# Altium PCB Assignment1.PcbDoc
Units mm, origin at the board's own origin, x right, y up, seen from the top; angles counter-clockwise.
Board outline 85.12 x 56.16 mm, 2 copper layers (Top Layer, Bottom Layer); 36 components, 17 nets, 114 pads, 30 vias.
Unrouted connection lines stored in the file: 2.
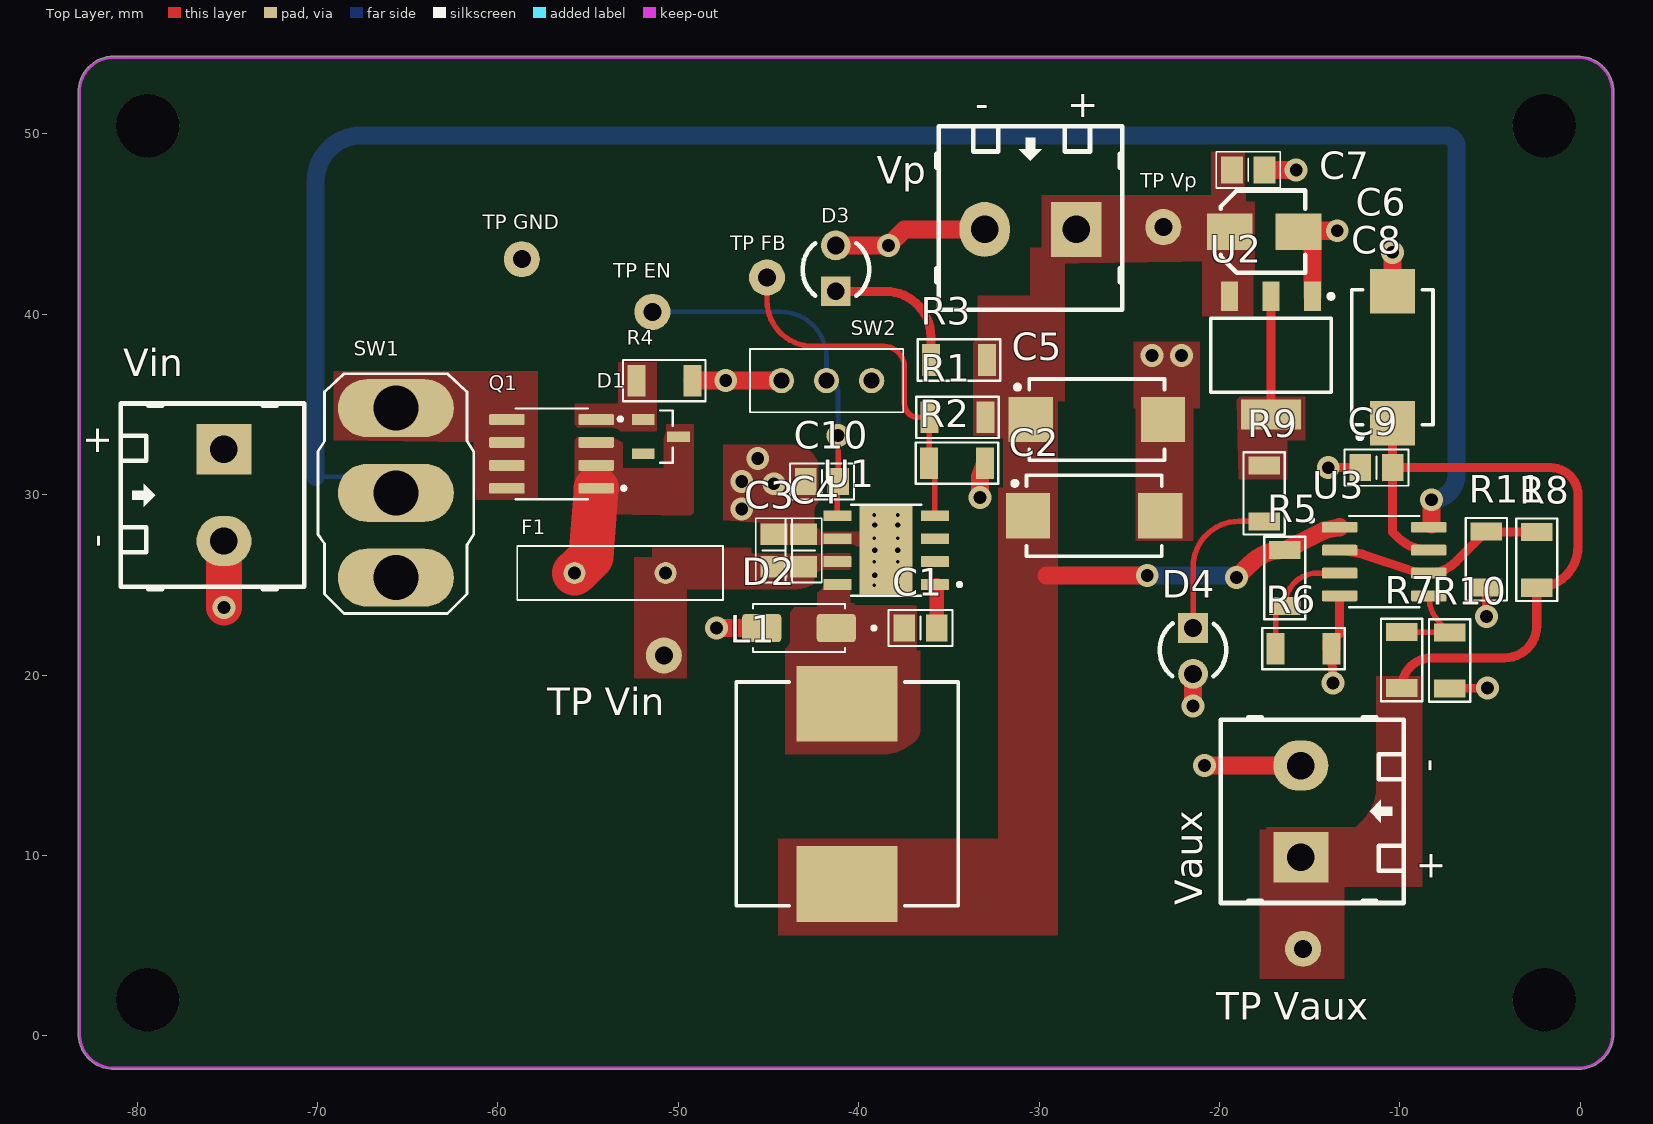
[diagram p0: Top Layer view]
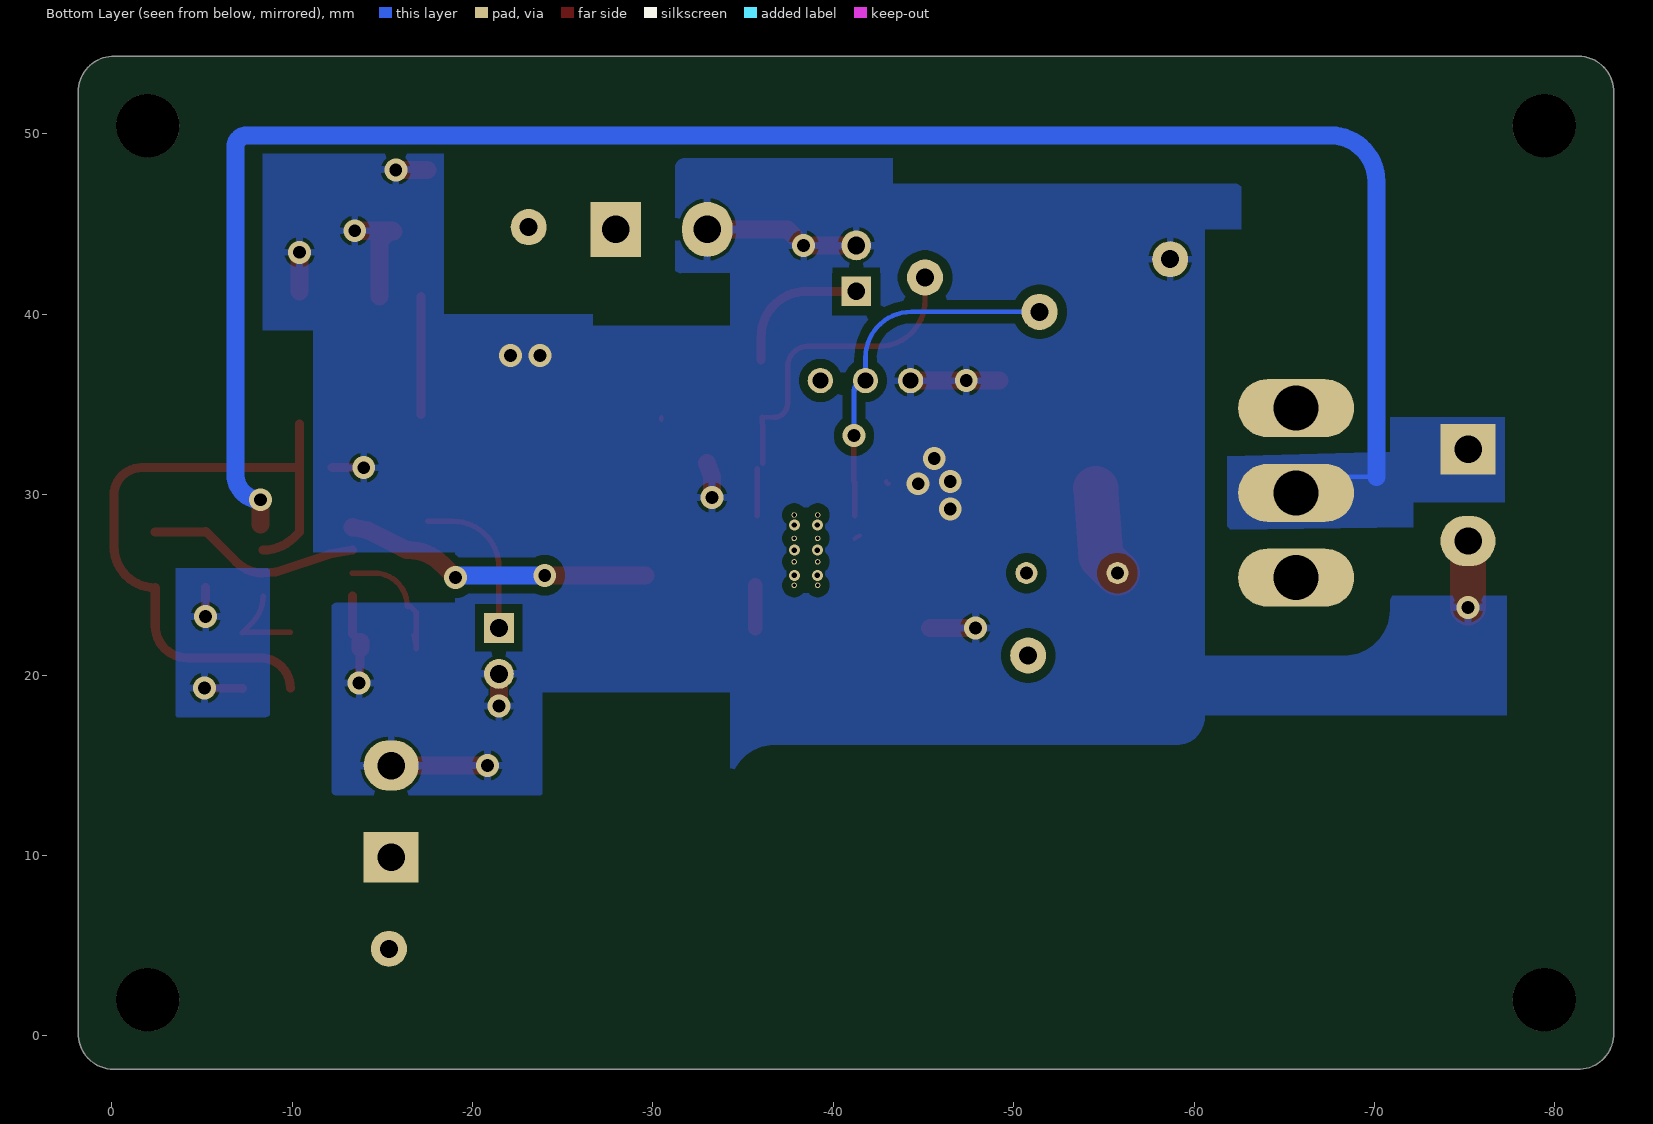
[diagram p1: Bottom Layer view, seen from below]
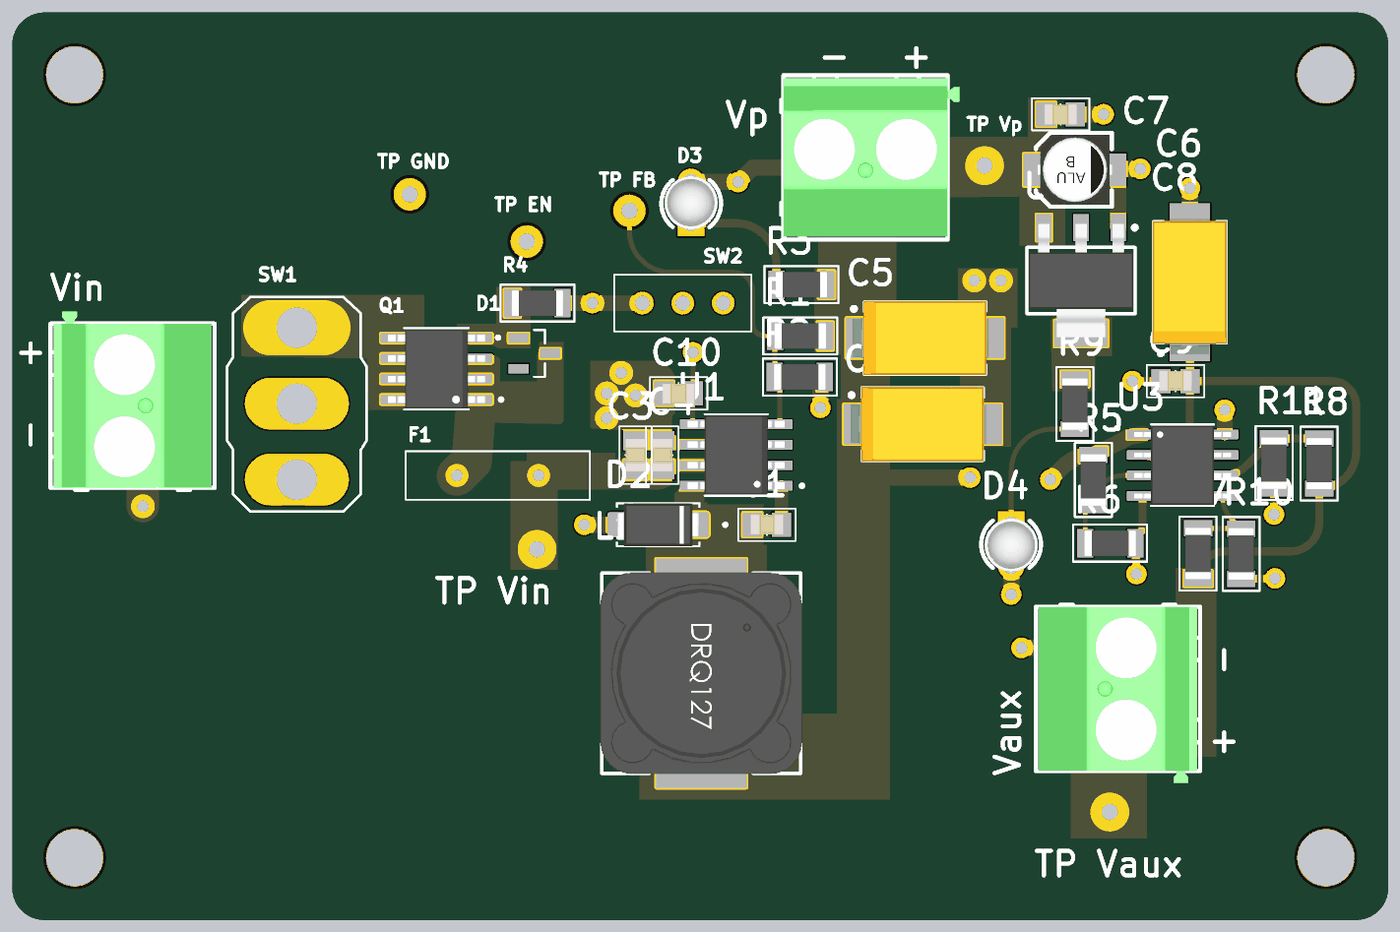
[diagram p2: 3D render of the assembled board from above, using the file's embedded part models]

## Layer stack, top to bottom
Top Solder: solder mask 0.0102, Solder Resist, Dk 3.5
Top Layer: signal copper 0.0356
Dielectric 1: dielectric 0.32, FR-4, Dk 4.8
Bottom Layer: signal copper 0.0356
Bottom Solder: solder mask 0.0102, Solder Resist, Dk 3.5

## Board outline
-83.26,-0.005 ccw(c-81.28,0.127) -81.412,-1.853 -81.407,-1.853 -0.256,-1.853 ccw(c-0.127,0.127) 1.853,-0.005 1.853,0 1.853,52.194 ccw(c-0.127,52.324) 1.858,52.324 ccw(c-0.127,52.324) 0.005,54.304 0,54.304 -81.151,54.304 ccw(c-81.28,52.324) -83.26,52.456 -83.26,52.451 -83.26,0.256 ccw(c-81.28,0.127)

## Design rules (kind name [scope] priority, off if disabled: settings)
Clearance [All] p1: gap=0.5 ignorepadtopadclearanceinfootprint=FALSE
PolygonConnect [All] p1: connectstyle=Direct reliefconductorwidth=0.4 reliefentries=4 polygonreliefangle="90 Angle" airgapwidth=0.2
RoutingVias [All] p1: holewidth=0.711 width=1.27 viastyle="Through Hole" minholewidth=0.711 minwidth=1.27 maxholewidth=0.711 maxwidth=1.27
SolderMaskExpansion [All] p1: expansion=0.102 istentingtop=FALSE
SupplyNets "Schematic Supply Nets" [InNet('GND')] p1: voltage=0.000
Width [All] p1: maxlimit=0.254 minlimit=0.254 preferedwidth=0.254
30 further rules are at their usual default settings.

## Components (designator, comment, footprint, x,y, rotation, side; value= is the part's Value field where it differs from the comment)
C1 "0.01uF" "C 0805" -36.576,22.606 r180 top
C2 "220uF" "C SMD TAN 2917 (E)" -26.947,28.829 r0 top
C3 "4.7uF" "C 0805" -44.704,26.913 r90 top
C4 "4.7uF" "C 0805" -43.053,26.913 r90 top
C5 "220uF" "C SMD TAN 2917 (E)" -26.797,34.163 r0 top
C6 "10uF" "C SMD ALU (B)" -17.526,44.577 r0 top
C7 "100nF" "C 0805" -18.404,48.006 r0 top
C8 "22uF" "C SMD TAN 2917 (E)" -10.414,37.615 r90 top
C9 "100nF" "C 0805" -11.303,31.496 r180 top
C10 "0.01uF" "C 0805" -42.037,30.734 r0 top
D1 "BZX84-C12" SOT95P230X110-3N -50.963,33.213 r0 top
D2 "B340A-E3/61T" DIOM5126X229N -43.307,22.606 r180 top
D3 "Led" "LED 3MM - green" -41.275,42.545 r90 top
D4 "Led" "LED 3MM - green" -21.463,21.336 r270 top
F1 "RUEF250" RUEF250 -55.753,25.654 r0 top
L1 "22uH" "Inductor SMD 12x12x8" -40.64,13.415 r270 top
Q1 "AO4407A" SOIC127P600X175-8N -57.023,32.258 r180 top
R1 "10k" "R 1206" -34.518,34.29 r0 top
R2 "3.3k" "R 1206" -34.544,31.75 r180 top
R3 "4.7k" "R 1206" -34.443,37.465 r0 top
R4 "100k" "R 1206" -50.774,36.322 r180 top
R5 "10k" "R 1206" -16.383,25.374 r90 top
R6 "5.6k" "R 1206" -15.341,21.463 r180 top
R7 "10k" "R 1206" -9.906,20.828 r270 top
R8 "10k" "R 1206" -2.413,26.39 r270 top
R9 "4.7k" "R 1206" -17.526,30.073 r90 top
R10 "12k" "R 1206" -7.239,20.802 r90 top
R11 "10k" "R 1206" -5.207,26.416 r90 top
SW1 "MTS-102" MTS-102 -65.659,30.099 r0 top
SW2 "SS12D00G3" SS12D00G3 -41.783,36.322 r180 top (schematic designator X1)
U1 "TPS5430DDA" VREG_LM5017MR/NOPB -38.481,26.924 r180 top
U2 "AMS1117" SOT-223 -17.145,37.719 r270 top
U3 "LM358M" SOIC127P599X175-8N -10.865,26.289 r0 top
Vaux "Header 2" HDR/Terminal/2 -15.494,12.446 r90 top (schematic designator P3)
Vin "Header 2" HDR/Terminal/2 -75.184,29.972 r270 top (schematic designator P1)
Vp "Header 2" HDR/Terminal/2 -30.48,44.704 r180 top (schematic designator P2)

## Footprints (in the part's own frame and the unit in brackets; to place one, negate y for a bottom-side part, rotate by r counter-clockwise, add the part's x,y. Pads: shape width x height; smd on the part's side, far side on the other; paste and mask are expansions set on the pad)
"C 0805" [mm] "Chip Capacitor, 2-Leads, Body 2.0x1.3mm, IPC Medium Density"
  rect 1.2x1.5 smd: 1(-0.9,0) 2(0.9,0)
  silkscreen extent -1.78,-1 1.78,1, body extent -1,-0.64 1,0.61, height 0.6
"C SMD ALU (B)" [mil] "SMD Aluminum Electrolytic Capacitor, size D (4.0 x 5.4 mm)"
  rect 100x80 smd: 1(-75,0) 2(75,0)
  silkscreen extent -95,-90 90,90, body extent -91,-85 91,85, height 213
"C SMD TAN 2917 (E)" [mm] "Molded Capacitor, 2-Leads, Body 7.3x4.3mm, IPC Medium Density"
  rect 2.45x2.5 smd: 1(-3.66,0) 2(3.66,0)
  silkscreen extent -4.52,-2.25 3.75,2.25, body extent -4.5,-2.3 4.5,2.31, height 3.1
DIOM5126X229N [mm]
  rrect25% 2.17x1.57 smd: A(2.065,0) C(-2.065,0)
  silkscreen extent -4.25,-1.33 2.55,1.33, body extent -2.55,-1.33 2.55,1.33, height 2.29
HDR/Terminal/2 [mil] "Header 2, 2 pin, hight 400mil, Pin to Pin 200mil, Colour Green"
  rect 110x120 hole 60: 1(-100,0)
  oval 110x120 hole 60: 2(100,0)
  silkscreen extent -200,-225 205,175, body extent -229,-218 200,168, height 559
"Inductor SMD 12x12x8" [mm] "Precision Wire Wound Inductor, 2-Leads, Body 12.3x12.3mm, IPC Low Density"
  rect 4.2x5.6 smd: 1(-5,0) 2(5,0)
  silkscreen extent -6.2,-6.15 6.2,6.15, body extent -6.25,-6.25 6.25,6.25, height 8.01
"LED 3MM - green" [mil]
  rect 65x65 hole 39: 1(-50,0)
  round 65 hole 39: 2(50,0)
  silkscreen extent -60,-73 55,72, body extent -66,-65 64,65, height 207
MTS-102 [mm]
  oval 6.432x3.216 hole 2.5: 1(0,4.7) 2(0,0) 3(0,-4.7)
  silkscreen extent -4.32,-6.68 4.32,6.6
"R 1206" [mm] "Chip Resistor, 2-Leads, Body 3.1x1.6mm, IPC Medium Density"
  rect 1x1.75 smd: 1(-1.55,0) 2(1.55,0)
  silkscreen extent -2.29,-1.14 2.29,1.14, body extent -1.6,-0.8 1.6,0.8, height 0.6
RUEF250 [mm]
  round 1.217 hole 0.71: 1(0,0) 2(5.05,0)
  silkscreen extent -3.17,-1.5 8.23,1.5
SOIC127P599X175-8N [mm]
  rrect25% 1.97x0.6 smd paste+0 mask+0.102: 1(-2.47,1.905) 2(-2.47,0.635) 3(-2.47,-0.635) 4(-2.47,-1.905) 5(2.47,-1.905) 6(2.47,-0.635) 7(2.47,0.635) 8(2.47,1.905)
  silkscreen extent -4.14,-2.52 1.95,2.52, body extent -3,-2.45 3,2.45, height 1.75
SOIC127P600X175-8N [mm]
  rrect25% 1.97x0.6 smd: 1(-2.475,1.905) 2(-2.475,0.635) 3(-2.475,-0.635) 4(-2.475,-1.905) 5(2.475,-1.905) 6(2.475,-0.635) 7(2.475,0.635) 8(2.475,1.905)
  silkscreen extent -4.1,-2.52 2,2.52, body extent -3,-2.45 3,2.45, height 1.75
SOT95P230X110-3N [mm]
  rect 1.26x0.59 smd: 1(-0.98,0.95) 2(-0.98,-0.95) 3(0.98,0)
  silkscreen extent -2.35,-1.45 0.65,1.45
SOT-223 [mm] "SOT223, 4-Leads, Body 6.7x7.3mm (max), Pitch 2.30mm, IPC Medium Density"
  rect 1.65x0.95 smd: 1(-3.275,2.3) 2(-3.275,0) 3(-3.275,-2.3)
  rect 1.65x3.3 smd: 4(3.275,0)
  silkscreen extent -3.4,-3.35 2.05,3.45, body extent -3.5,-3.25 3.5,3.25, height 1.64
SS12D00G3 [mm]
  round 1.4 hole 0.9: 1(-2.5,0) 2(0,0) 3(2.5,0)
  silkscreen extent -4.25,-1.75 4.25,1.75
VREG_LM5017MR/NOPB [mm]
  rrect5% 1.55x0.6 smd mask+0: 1(-2.7,1.905) 2(-2.7,0.635) 3(-2.7,-0.635) 4(-2.7,-1.905) 5(2.7,-1.905) 6(2.7,-0.635) 7(2.7,0.635) 8(2.7,1.905)
  rect 2.95x4.9 smd paste-3 mask+0: 9(0,0)
  round 0.3 hole 0.2: 10(-0.65,1.95) 11(0.65,1.95) 12(-0.65,0.65) 13(0.65,0.65) 14(-0.65,-0.65) 15(0.65,-0.65) 16(-0.65,-1.95) 17(0.65,-1.95)
  silkscreen extent -4.17,-2.52 1.95,2.52, body extent -3,-2.45 3,2.45, height 1.7

## Part data
C1 C3 C4 C7 C9 C10: library part "Capacitor NP", "Capacitor non-pol"
C2 C5 C6 C8: library part Capacitor, "Capacitor pol"
D1: "Zener Diode 12 V 250 mW Â±5% Surface Mount TO-236AB", PACKAGE="SOT-23 NXP Semiconductors", Check_prices=https://www.snapeda.com/parts/BZX84-C12/Nexperia/view-part/?ref=eda, MF="Nexperia USA", MP=BZX84-C12, SnapEDA_Link=https://www.snapeda.com/parts/BZX84-C12/Nexperia/view-part/?ref=snap
D2: "Diode Schottky 40 V 3A Surface Mount DO-214AC (SMA)", PACKAGE="DO-214 Vishay Semiconductor", Check_prices=https://www.snapeda.com/parts/B340A-E3/61T/Vishay/view-part/?ref=eda, MF="Vishay Semiconductor", MP=B340A-E3/61T, SnapEDA_Link=https://www.snapeda.com/parts/B340A-E3/61T/Vishay/view-part/?ref=snap
D3 D4: "Typical LED"
F1: "Littelfuse 2.5A Radial Leaded PCB Mount Resettable Fuse, 30V dc", Manufacturer_Name=LITTELFUSE, Mouser Part Number=650-RUEF250, Arrow Part Number=RUEF250, Arrow Price/Stock=https://www.arrow.com/en/products/ruef250/littelfuse?utm_currency=USD&region=europe, Datasheet Link=https://www.littelfuse.com/~/media/electronics/product_specifications/resettable_ptcs/littelfuse_ptc_ruef250_product_specification.pdf.pdf, Geometry.Height=18.3mm, Manufacturer_Part_Number=RUEF250, Mouser Price/Stock=https://www.mouser.co.uk/ProductDetail/Littelfuse/RUEF250?qs=hv6pn79dJPQsHwuAgSfH9w%3D%3D
L1: library part Inductor, "Inductor"
Q1: "P-Channel 30 V 12A (Ta) 3.1W (Ta) Surface Mount 8-SOIC", PACKAGE="SOIC-8 Alpha &amp; Omega Semiconductor", Check_prices=https://www.snapeda.com/parts/AO4407A/Alpha/view-part/?ref=eda, MF="Alpha &", MP=AO4407A, SnapEDA_Link=https://www.snapeda.com/parts/AO4407A/Alpha/view-part/?ref=snap
R1 R2 R3 R4 R5 R6 R7 R8 R9 R10 R11: library part Resistor, "Resistor"
SW1: "Rectangular Cable Assemblies .100 Mini Mate Single Row Discrete Wire Cable Assembly, Terminal", PACKAGE=None, Availability=Unavailable, Check_prices=https://www.snapeda.com/parts/MTS102/Motorola/view-part/698799/?ref=eda, MF=Motorola, MP=MTS102, Price=None, SnapEDA_Link=https://www.snapeda.com/parts/MTS102/Motorola/view-part/698799/?ref=snap
SW2: "3 Pin Toggle Switch", Manufacturer_Name=Vimex, Datasheet Link=http://vimex.com/switches/techdocs/SS12D00-tech.pdf, Geometry.Height=7mm, Manufacturer_Part_Number=SS12D00G3
U1: "5.5V to 36V Input, 3A, 500kHz Step-Down Converter", PACKAGE="HSOIC-8 Texas Instruments", Check_prices=https://www.snapeda.com/parts/TPS5430DDA/Texas+Instruments/view-part/?ref=eda, MF="Texas Instruments", MP=TPS5430DDA, SnapEDA_Link=https://www.snapeda.com/parts/TPS5430DDA/Texas+Instruments/view-part/?ref=snap
U2: "1A LDO Voltage Regulator, ADJ or fixed 1.5/1.8/2.5/2.85/3.3/5V"
U3: "Op Amp Dual Low Power Amplifier Â±16V/32V 8-Pin SOIC Tube", PACKAGE="SOIC-8 ON Semiconductor", Check_prices=https://www.snapeda.com/parts/LM358M/Onsemi/view-part/?ref=eda, MF=onsemi, MP=LM358M, SnapEDA_Link=https://www.snapeda.com/parts/LM358M/Onsemi/view-part/?ref=snap
Vaux Vin Vp: "Header, 2-Pin"

## Free pads (board coordinates)
  round 3.5 hole 3.5 mask+0.2: 3(-79.407,50.451) 3(-79.407,2) 3(-2,2) 3(-2,50.451)
  round 2 hole 1 mask+0.2: 3(-58.674,43.053) 3(-51.435,40.132) 3(-50.8,21.082) 3(-45.085,42.037) 3(-23.114,44.831) 3(-15.367,4.826)

## Via types
v1: diameter 1.27, hole 0.711, Top Layer to Bottom Layer, 24 vias
v2: diameter 0.6, hole 0.3, Top Layer to Bottom Layer, 6 vias

## Nets (pads, with @x,y where several pads share a name; then routed paths per layer and width w, separated by ;. In a path a pad name is that pad's centre, name@x,y a point inside that pad or via, vN(x,y) a via of type N, cw(c..) or ccw(c..) an arc to the next point about the centre after c; other vN are vias at no path point)
3.3V: C8.1 C9.1 pad.3@-15.367,4.826 R7.2 R8.2 R9.2 U2.2 U2.4 U3.7 Vaux.1 | length 44
  Top Layer w0.254: C8.1 cw(c-10.441,33.928) C8.1@-10.403,33.928
  Top Layer w0.5: U2.4 U2.2 ; C9.1@-10.414,31.469 -10.414,27.94 -10.107,27.633 ccw(c-8.395,29.345) U3.7 ; C8.1@-10.403,33.928 C9.1 -1.651,31.496 cw(c-1.651,29.972) -0.127,29.972 -0.127,27.126 cw(c-2.413,27.126) R8.2 -2.413,22.733 cw(c-4.191,22.733) -4.191,20.955 -8.229,20.955 ccw(c-8.229,19.278) R7.2
5V: C2.1 C5.1 C6.1 C7.1 L1.2 pad.3@-23.114,44.831 R1.2 R3.2 R5.2 U2.3 U3.1 Vp.1 | length 17.2
  Top Layer w0.254: C5.1 C5.1@-30.457,34.29 ; R5.2@-16.474,26.924 R5.2
  Top Layer w1: -29.591,25.527 v1(-24.003,25.527) ; v1(-19.05,25.4) -18.27,26.18 cw(c-16.474,24.384) R5.2@-16.474,26.924 ; R5.2 -15.635,27.297 -14.193,28.021 U3.1
  Bottom Layer w1: v1(-24.003,25.527) -19.25,25.527 -19.123,25.4 v1(-19.05,25.4)
12V: SW1.2 U3.8 Vin.1 | length 108.4
  Top Layer w0.254: U3.8 ccw(c-8.395,28.334) U3.8@-8.255,28.334
  Top Layer w1: U3.8@-8.255,28.334 v1(-8.255,29.718)
  Bottom Layer w0.254: -70.104,30.988 -66.548,30.988 cw(c-66.548,30.099) SW1.2
  Bottom Layer w1: -70.104,30.988 -70.104,47.371 cw(c-67.564,47.371) -67.564,49.911 -7.493,49.911 cw(c-7.493,49.276) -6.858,49.276 -6.858,31.115 cw(c-8.255,31.115) v1(-8.255,29.718)
boot: C1.1 U1.1 | length 2.5
  Top Layer w0.5: U1.1 -35.726,25.019 U1.1@-35.676,24.969
  Top Layer w0.8: C1.1 U1.1@-35.676,24.969
GND: C2.2 C3.2 C4.2 C5.2 C6.2 C7.2 C8.2 C9.2 C10.1 D2.A D3.2 D4.2 pad.3@-58.674,43.053 R2.1 R4.1 R6.1 R10.1 R11.1 SW2.3 U1.6 U1.9 U2.1 U3.4 Vaux.2 Vin.2 Vp.2 | length 51.3
  Top Layer w0.254: C10.1@-43.064,30.607 ccw(c-43.064,30.734) C10.1 ; U1.6@-41.47,27.732 U1.6 ; Vp.2@-33.909,43.815 ccw(c-33.909,44.704) Vp.2
  Top Layer w0.5: v1(-13.97,31.496) C9.2 ; R6.1 v1(-13.716,19.558) ; R6.1@-13.791,21.838 -13.335,22.294 U3.4 ; R10.1 v1(-5.149,19.285) ; v1(-5.207,23.241) R11.1
  Top Layer w1: R4.1 v1(-47.371,36.322) SW2.3 ; v1(-47.879,22.606) D2.A ; D3.2 v1(-38.354,43.815) -37.465,44.704 Vp.2 ; v1(-33.274,29.845) -33.274,31.002 R2.1 ; v1(-21.463,18.288) D4.2 ; v1(-20.828,14.986) Vaux.2 ; C7.2 v1(-15.748,48.006) ; C6.2 -15.367,44.577 -14.851,44.061 -14.851,43.481 -14.845,43.475 U2.1 ; C6.2@-15.568,44.63 v1(-13.474,44.63) ; R6.1 R6.1@-13.791,21.838 ; C8.2 v1(-10.414,43.434)
  Top Layer w2: v1(-75.184,23.749) Vin.2
  other v1: -46.482,29.21 -44.704,30.607 -46.482,30.734 -45.593,32.004 -23.749,37.719 -22.098,37.719
  other v2: -39.116,25.527 -37.846,25.527 -39.116,26.924 -37.846,26.924 -39.116,28.321 -37.846,28.321
NetC1_2: C1.2 D2.C L1.1 U1.8
NetC3_1: C3.1 C4.1 F1.2 pad.3@-50.8,21.082 U1.7 | length 0.1
  Top Layer w0.5: F1.2@-50.8,25.557 F1.2
NetC10_2: C10.2 pad.3@-51.435,40.132 SW2.2 U1.5 | length 20.3
  Top Layer w0.254: C10.2@-41.181,30.69 cw(c-41.137,30.69) C10.2
  Top Layer w0.3: U1.5 C10.2@-41.181,30.69 ; C10.2 v1@-41.137,33.274
  Bottom Layer w0.254: pad.3@-51.435,40.132 -44.323,40.132 cw(c-44.323,37.592) -41.783,37.592 SW2.2
  Bottom Layer w0.3: SW2.2 cw(c-41.783,35.687) -41.148,35.687 v1(-41.148,33.274)
NetD1_1: D1.1 Q1.4 R4.2
NetD1_3: D1.3 F1.1 Q1.1 Q1.2 Q1.3 | length 6
  Top Layer w0.254: Q1.1@-55.406,30.18 Q1.1
  Top Layer w2.5: F1.1 -55.562,25.818 -54.84,26.539 Q1.1
NetD3_1: D3.1 R3.1 | length 8
  Top Layer w0.5: D3.1 -38.533,41.275 cw(c-38.533,38.735) -35.993,38.735 R3.1
NetD4_1: D4.1 R9.1 | length 8.8
  Top Layer w0.3: D4.1 -21.463,25.983 cw(c-18.923,25.983) -18.923,28.523 R9.1
NetQ1_5: Q1.5 Q1.6 Q1.7 Q1.8 SW1.1
NetR1_1: pad.3@-45.085,42.037 R1.1 R2.2 U1.4 | length 20
  Top Layer w0.254: -36.703,34.29 R1.1
  Top Layer w0.3: pad.3@-45.085,42.037 -45.085,40.767 ccw(c-42.545,40.767) -42.545,38.227 -38.608,38.227 cw(c-38.608,37.084) -37.465,37.084 -37.465,35.052 ccw(c-36.703,35.052) -36.703,34.29 ; R2.2 -36.086,32.498 -36.086,33.542 R1.1 ; U1.4 R2.2@-35.781,31.437
sense1: R5.1 R6.2 U3.3 | length 7.5
  Top Layer w0.254: R6.2 R6.2@-16.73,22.211
  Top Layer w0.3: R6.2 -16.891,23.474 -16.541,23.824 R5.1 cw(c-14.553,23.824) -14.553,25.654 U3.3
sense2: R7.1 R10.2 U3.5 | length 5.1
  Top Layer w0.3: R7.1 -7.265,22.378 R10.2 -7.776,22.889 cw(c-6.28,24.384) U3.5
Vref1: R8.1 R11.2 U3.2 U3.6 | length 11.9
  Top Layer w0.5: U3.2 -13.051,26.874 -12.084,26.704 -9.078,25.704 U3.6 ccw(c-8.395,27.769) -6.9,26.273 R11.2 ; R11.2@-5.144,27.94 R8.1
pads on no net: D1.2 SW1.3 SW2.1 U1.2 U1.3 U1.10 U1.11 U1.12 U1.13 U1.14 U1.15 U1.16 U1.17

## Polygon pours and split planes (outlines as drawn)
GND on Bottom Layer "GND_L02_P032" (solid, remove dead copper, pour order 32): -77.359,24.405 -70.972,24.405 ccw(c-70.972,24.511) -70.866,24.511 -70.866,23.622 ccw(c-68.326,23.622) -68.326,21.082 -58.801,21.082 cw(c-58.801,20.574) -58.293,20.574 -58.293,16.764 ccw(c-59.309,16.764) -59.309,17.78 -77.343,17.78 -77.343,24.384
GND on Bottom Layer "GND_L02_P031" (solid, remove dead copper, pour order 31): -21.082,39.37 cw(c-21.082,37.338) -19.05,37.338 -19.05,18.796 ccw(c-19.304,18.796) -19.304,19.05 -48.895,19.05 ccw(c-48.895,19.304) -48.641,19.304 -48.641,39.116 cw(c-48.387,39.116) -48.387,39.37 -20.955,39.37
GND on Bottom Layer "GND_L02_P030" (solid, remove dead copper, pour order 30): -62.611,47.498 ccw(c-62.357,47.498) -62.357,47.244 -31.75,47.244 ccw(c-31.75,44.704) -34.29,44.704 -34.29,13.716 ccw(c-36.703,13.716) -36.703,16.129 -59.055,16.129 cw(c-59.055,17.653) -60.579,17.653 -60.579,44.704 -62.611,44.704
GND on Bottom Layer "GND_L02_P029" (solid, remove dead copper, pour order 29): -43.307,48.641 -31.75,48.641 cw(c-31.75,48.133) -31.242,48.133 -31.242,41.91 ccw(c-31.623,41.91) -31.623,42.291 -43.307,42.291
GND on Bottom Layer "GND_L02_P028" (solid, remove dead copper, pour order 28): -18.415,49.276 -18.415,39.37 ccw(c-18.161,39.37) -18.161,39.116 -8.382,39.116 -8.382,49.276
GND on Bottom Layer "GND_L02_P027" (solid, remove dead copper, pour order 27): -26.67,40.005 -11.303,40.005 cw(c-11.303,39.878) -11.176,39.878 -11.176,26.797 -25.019,26.797 cw(c-25.019,28.448) -26.67,28.448
GND on Bottom Layer "GND_L02_P026" (solid, remove dead copper, pour order 26): -3.556,25.908 -3.556,17.78 cw(c-3.683,17.78) -3.683,17.653 -8.89,17.653 ccw(c-8.89,17.78) -8.763,17.78 -8.763,25.781 cw(c-8.636,25.781) -8.636,25.908 -6.477,25.908
GND on Bottom Layer "GND_L02_P025" (solid, remove dead copper, pour order 25): -23.876,23.749 cw(c-23.622,23.749) -23.622,24.003 -12.065,24.003 ccw(c-12.065,23.876) -12.192,23.876 -12.192,13.589 cw(c-12.446,13.589) -12.446,13.335 -23.749,13.335 cw(c-23.749,13.462) -23.876,13.462
12V on Bottom Layer "12V_L02_P000" (solid, remove dead copper, pour order 0): -77.216,34.29 -77.216,29.591 -72.136,29.591 -72.136,28.194 -61.849,28.067 -61.849,32.131 -70.866,32.385 -70.866,34.29
3.3V on Top Layer "3.3V_L01_P024" (solid, remove dead copper, pour order 24): -17.78,11.43 -13.081,11.43 -13.081,3.175 -17.78,3.175
NetC3_1 on Top Layer "NETC3_1_L01_P023" (solid, remove dead copper, pour order 23): -52.451,19.812 -49.53,19.812 -49.53,26.543 -52.451,26.543
3.3V on Top Layer "3.3V_L01_P022" (solid, remove dead copper, pour order 22): -17.351,11.602 ccw(c-17.236,11.486) -17.399,11.486 -17.399,8.255 -8.763,8.255 -8.763,19.939 -11.303,19.939 -11.303,13.752 cw(c-13.843,13.752) -12.047,11.956 -12.446,11.557 -17.399,11.557
5V on Top Layer "5V_L01_P020" (solid, remove dead copper, pour order 20): -28.575,36.322 -28.575,35.179 -32.004,35.179 -32.004,36.322
5V on Top Layer "5V_L01_P019" (solid, remove dead copper, pour order 19): -33.401,36.322 -28.575,36.322 -28.575,43.688 -30.48,43.688 -30.48,41.021 -33.401,41.021
5V on Top Layer "5V_L01_P018" (solid, remove dead copper, pour order 18): -29.845,46.609 -29.845,42.799 -20.193,42.926 -20.193,46.609
5V on Top Layer "5V_L01_P017" (solid, remove dead copper, pour order 17): -33.655,38.608 -33.655,33.274 -31.623,33.274 -31.623,38.481
3.3V on Top Layer "3.3V_L01_P016" (solid, remove dead copper, pour order 16): -19.05,35.433 -15.24,35.433 -15.24,33.02 -16.256,33.02 -16.256,30.861 -18.923,30.861
5V on Top Layer "5V_L01_P015" (solid, remove dead copper, pour order 15): -20.447,49.022 -18.542,49.022 -18.542,46.228 -18.034,46.228 -18.034,39.878 -20.955,39.878 -20.955,46.228 -20.447,46.228
GND on Top Layer "GND_L01_P014" (solid, remove dead copper, pour order 14): -24.765,38.481 -24.765,34.798 -21.082,34.798 -21.082,38.481
GND on Top Layer "GND_L01_P013" (solid, remove dead copper, pour order 13): -24.638,35.56 -24.638,27.432 -21.463,27.432 -21.463,35.56
GND on Top Layer "GND_L01_P012" (solid, remove dead copper, pour order 12): -47.498,32.766 -43.688,32.766 cw(c-43.688,31.242) -42.164,31.242 -42.164,27.178 ccw(c-42.209,27.178) -42.209,27.223 -45.466,27.223 -45.466,28.448 -47.498,28.575
GND on Top Layer "GND_L01_P011" (solid, remove dead copper, pour order 11): -45.466,28.448 -42.164,28.448 -42.164,27.94 -39.624,27.94 -39.624,26.924 ccw(c-39.878,26.797) -40.005,27.051 -45.466,27.051
5V on Top Layer "5V_L01_P009" (solid, remove dead copper, pour order 9): -31.886,35.676 -28.983,35.676 ccw(c-28.983,35.714) -28.956,35.687 -28.956,5.588 -44.45,5.588 -44.45,10.922 -32.258,10.922 -32.258,35.687 -31.877,35.687
NetC1_2 on Top Layer "NETC1_2_L01_P007" (solid, remove dead copper, pour order 7): -40.259,25.4 -42.164,25.4 ccw(c-41.857,25.093) -42.291,25.093 -42.291,23.749 -43.561,23.749 ccw(c-42.335,22.523) -44.069,22.523 -44.069,15.621 -38.644,15.621 ccw(c-38.644,18.161) -36.848,16.365 -36.83,16.383 ccw(c-37.443,16.996) -36.576,16.996 -36.576,23.876 -40.259,23.876
NetC3_1 on Top Layer "NETC3_1_L01_P006" (solid, remove dead copper, pour order 6): -51.391,27.127 -51.435,27.083 -51.435,24.765 -43.57,24.765 ccw(c-43.57,26.933) -42.037,25.4 cw(c-41.424,24.787) -41.424,25.654 -40.259,25.654 -40.259,27.051 -51.435,27.051
NetD1_3 on Top Layer "NETD1_3_L01_P004" (solid, remove dead copper, pour order 4): -55.753,33.274 -51.054,33.274 ccw(c-51.054,33.528) -50.8,33.528 -50.8,33.909 -49.149,33.909 -49.149,28.829 -55.753,28.956
NetD1_1 on Top Layer "NETD1_1_L01_P002" (solid, remove dead copper, pour order 2): -53.34,37.338 -51.181,37.338 -51.181,33.528 -55.753,33.528 -55.753,35.052 -53.34,35.052
NetQ1_5 on Top Layer "NETQ1_5_L01_P001" (solid, remove dead copper, pour order 1): -69.088,36.83 -69.088,33.02 -61.341,32.893 -61.214,29.718 -57.785,29.718 -57.785,36.83

## Keep-outs
Top Layer:
  lines w0.15: -83.185,0 -83.185,52.451 cw(c-81.28,52.324) -81.153,54.229 ; -83.185,0.254 ccw(c-81.28,0.127) -81.407,-1.778 0,-1.778 ; -81.407,54.229 0,54.229 cw(c-0.127,52.324) 1.778,52.197 ; -0.254,-1.778 ccw(c-0.127,0.127) 1.778,0 1.778,52.451

## Silkscreen, mask and mechanical layers (free items; w line width, h text height)
Top Overlay:
  text "-" at -33.528,50.927 h1.52
  text "+" at -28.448,50.927 h1.52
  text "TP Vp" at -24.384,47.003 h0.8
  text "TP GND" at -60.833,44.704 h0.8
  text "TP FB" at -47.117,43.561 h0.8
  text "TP EN" at -53.594,42.037 h0.8
  text "+" at -81.534,32.131 h1.52 r90
  text "-" at -81.534,27.051 h1.52 r90
  text "TP Vin" at -57.277,17.78 h1.52
  text "-" at -8.89,15.367 h1.52 r270
  text "+" at -8.89,10.287 h1.52 r270
  text "TP Vaux" at -20.193,0.889 h1.52